# Altium PCB RPlan_LB-button.PcbDoc
Units mm, origin at the board's own origin, x right, y up, seen from the top; angles counter-clockwise.
Board outline 38.2 x 43.28 mm, 2 copper layers (Top Layer, Bottom Layer); 36 components, 101 nets, 271 pads, 28 vias.
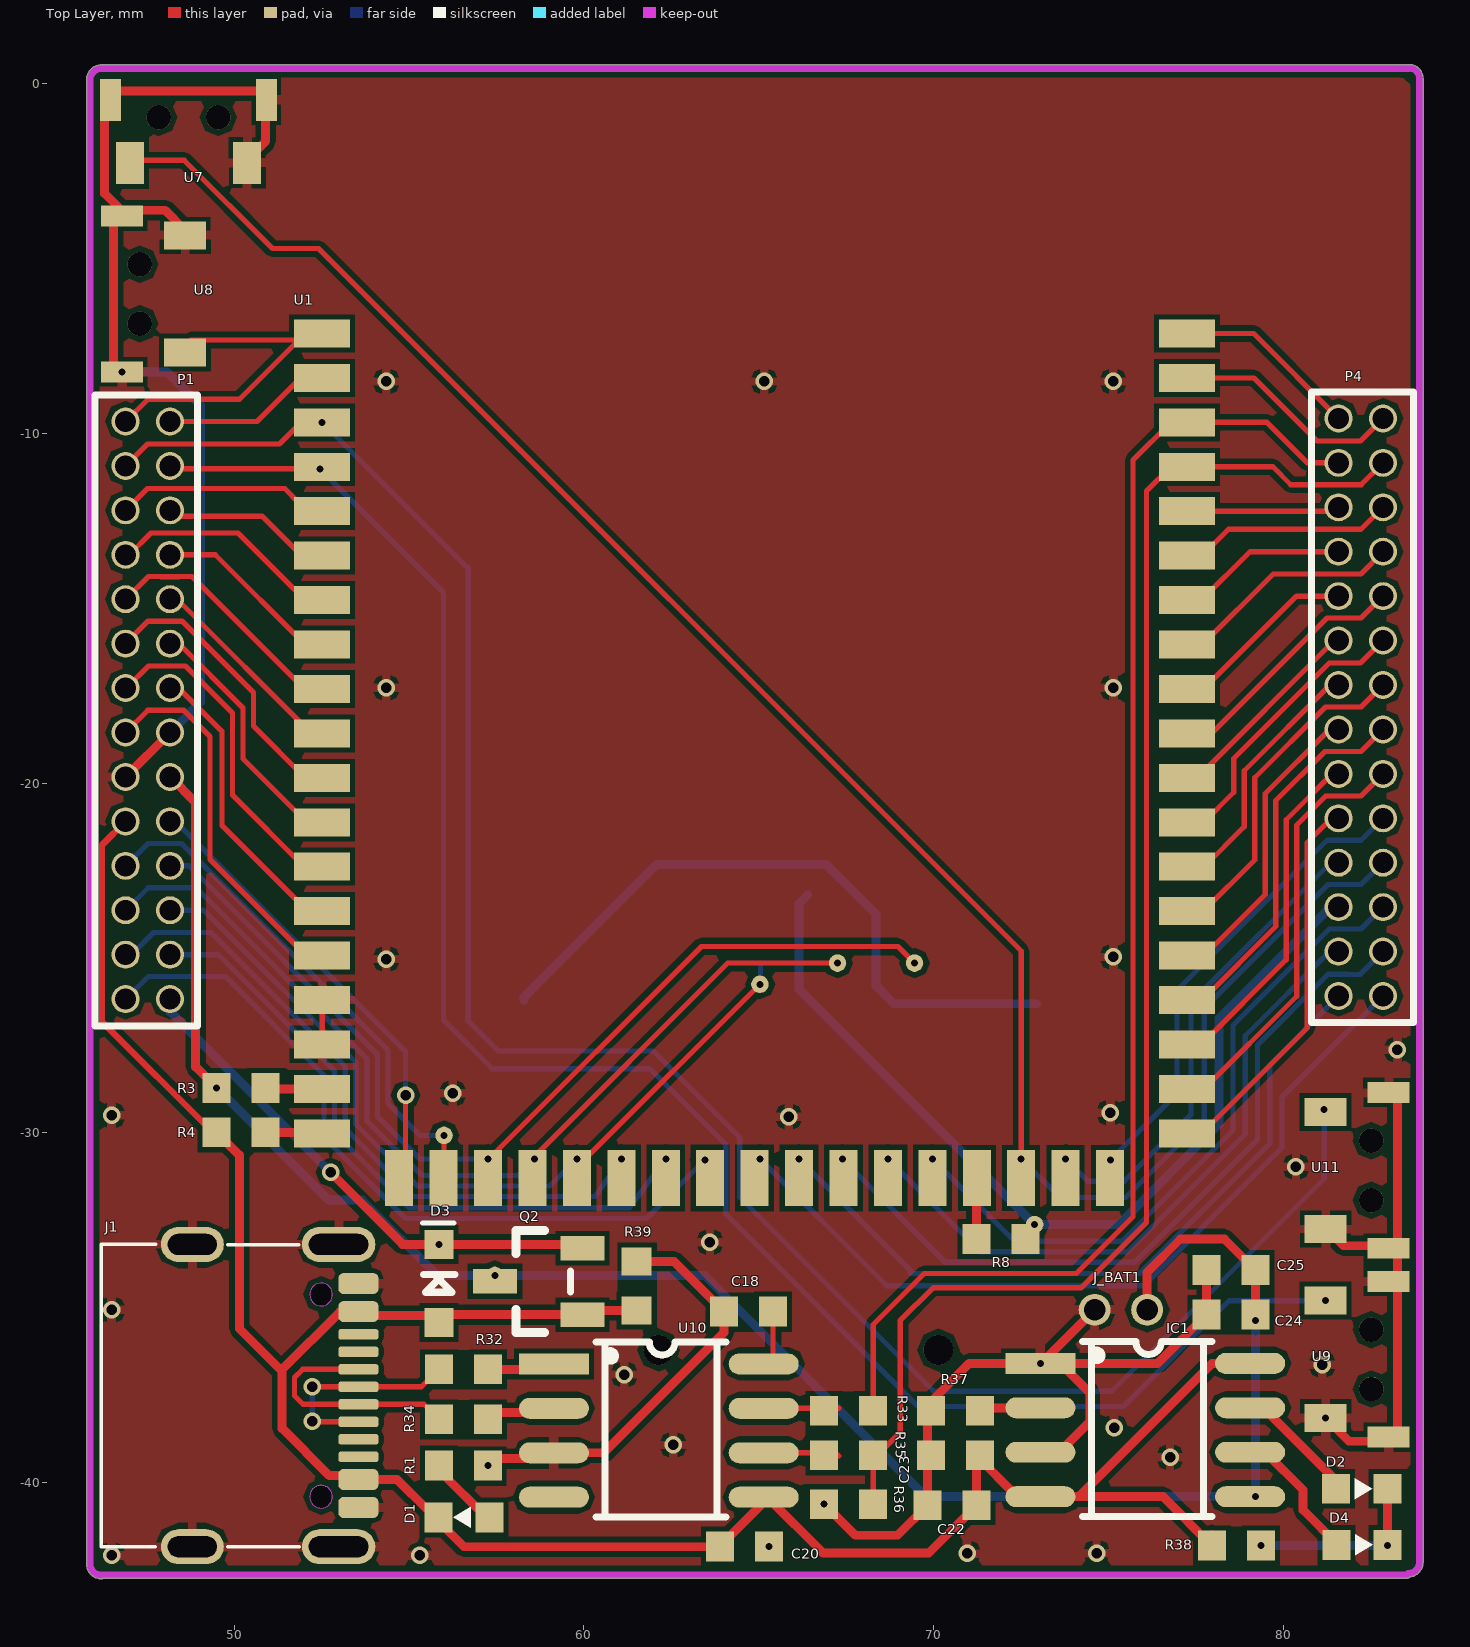
[diagram p0: Top Layer view]
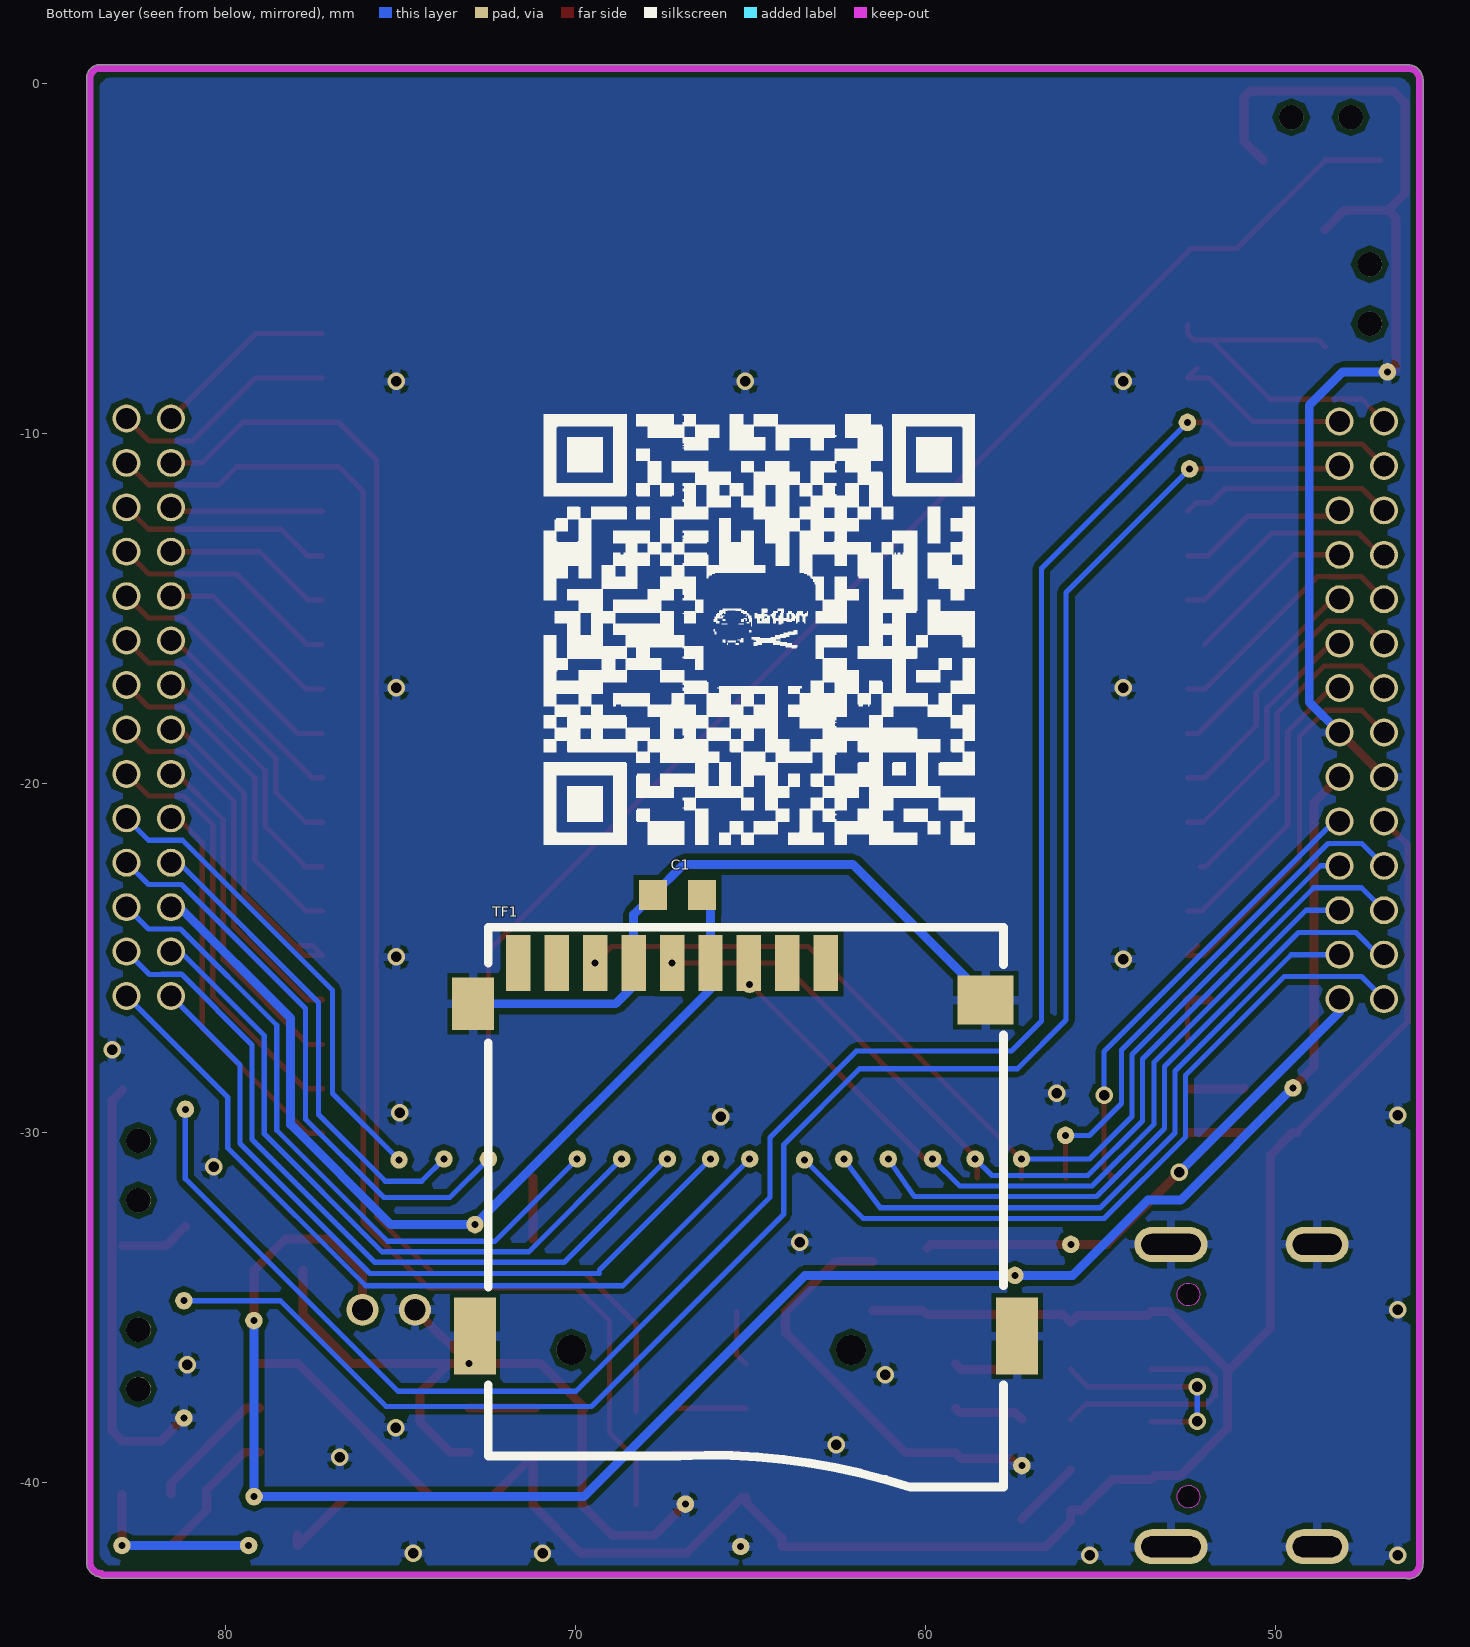
[diagram p1: Bottom Layer view, seen from below]

## Layer stack, top to bottom
Top Solder: solder mask 0.0102, Solder Resist, Dk 3.5
Top Layer: signal copper 0.0356
Dielectric 1: dielectric 0.32, FR-4, Dk 4.8
Bottom Layer: signal copper 0.0356
Bottom Solder: solder mask 0.0102, Solder Resist, Dk 3.5

## Board outline
45.782,-42.32 cw(c45.882,-42.32) 45.785,-42.295 cw(c45.882,-42.27) 45.782,-42.27 45.782,0.108 cw(c45.882,0.108) 45.783,0.123 cw(c46.206,0.108) 46.206,0.531 83.552,0.531 cw(c83.591,0.438) 83.591,0.539 cw(c83.591,0.148) 83.982,0.148 83.982,-42.269 83.982,-42.27 ccw(c83.882,-42.27) 83.982,-42.269 83.982,-42.27 cw(c83.559,-42.27) 83.602,-42.691 cw(c83.523,-42.629) 83.523,-42.729 46.255,-42.729 cw(c46.205,-42.642) 46.205,-42.743 cw(c46.205,-42.32)

## Design rules (kind name [scope] priority, off if disabled: settings)
Clearance [All] p1: gap=0.15 ignorepadtopadclearanceinfootprint=FALSE
PolygonConnect [All] p1: connectstyle=Relief reliefconductorwidth=0.254 reliefentries=4 polygonreliefangle="90 Angle" airgapwidth=0.127
RoutingVias [All] p1: holewidth=0.711 width=1.27 viastyle="Through Hole" minholewidth=0.711 minwidth=1.27 maxholewidth=0.711 maxwidth=1.27
SolderMaskExpansion [All] p1: expansion=0.102
Width [All] p1: maxlimit=0.254 minlimit=0.1 preferedwidth=0.254
30 further rules are at their usual default settings.

## Components (designator, comment, footprint, x,y, rotation, side; value= is the part's Value field where it differs from the comment)
C1 "0.1uf" 0603C 67.091,-23.198 r0 bottom
C18 "104" 0603C 64.705,-35.106 r180 top
C20 "104" 0603C 64.584,-41.82 r0 top
C22 "105" 0603C 70.52,-40.637 r0 top
C23 "104" 0603C 70.615,-39.212 r180 top
C24 "104" 0603C 78.494,-35.189 r180 top
C25 "106" 0603C 78.494,-33.919 r0 top
D1 "LED0" 0603_LED_R 56.6,-41.07 r0 top
D2 "LED0" 0603_LED_R 82.195,-40.091 r180 top
D3 "1N5819" SOD-323 55.85,-34.3 r90 top
D4 "LED0" 0603_LED_G 82.205,-41.77 r180 top
IC1 "TP4056/TC4056" SOP8_150mil 76.043,-38.491 r0 top
J1 "USB_TypeC" USB_TypeC 48.806,-41.826 r270 top
J_BAT1 "Header 2" BAT 75.346,-34.554 r180 top
P1 "connect" CONNECT2 49.075,-26.936 r180 top
P4 "connect" CONNECT2 80.662,-8.814 r0 top
Q2 "PMOS" SOT-23-3 58.709,-34.244 r0 top
R1 "10K" 0603C 56.55,-39.507 r180 top
R3 "" 0603C 50.2,-28.712 r180 top value=0R
R4 "" 0603C 50.2,-29.982 r180 top value=0R
R8 "" 0603C 71.917,-33.03 r0 top value=0R
R32 "0R" 0603C 56.55,-36.756 r180 top
R33 "1.2K" 0603C 67.567,-37.942 r180 top
R34 "0R" 0603C 56.55,-38.181 r180 top
R35 "1.2K" 0603C 67.567,-39.212 r180 top
R36 "1.5K" 0603C 67.567,-40.609 r0 top
R37 "1.5K" 0603C 70.615,-37.942 r180 top
R38 "4.7K" 0603C 78.648,-41.793 r180 top
R39 "100K" 0603C 61.503,-34.369 r270 top
TF1 "" TF1 62.848,-25.145 r180 bottom
U1 "RW052" RW052 64.877,-15.629 r0 top
U7 "key" KEY 48.697,-0.97 r0 top
U8 "key" KEY 47.3,-6.02 r90 top
U9 "key" KEY 82.5,-36.47 r270 top
U10 "CH330N" SOP8_150mil 62.138,-38.506 r0 top
U11 "key" KEY 82.5,-31.07 r270 top

## Footprints (in the part's own frame and the unit in brackets; to place one, negate y for a bottom-side part, rotate by r counter-clockwise, add the part's x,y. Pads: shape width x height; smd on the part's side, far side on the other; paste and mask are expansions set on the pad)
0603_LED_G [mm]
  rect 0.8x0.85 smd: 1(-0.765,0.007) 2(0.695,0.007)
  silkscreen extent -0.34,-0.29 0.17,0.31, body extent -0.84,-0.39 0.78,0.41, height 0.6
0603_LED_R [mm]
  rect 0.8x0.85 smd: 1(-0.765,0.08) 2(0.695,0.08)
  silkscreen extent -0.34,-0.22 0.17,0.38, body extent -0.84,-0.32 0.78,0.48, height 0.6
0603C [mm] "http://www.samsungsem.com/cn/front/downloadcms.do?path=%2F%2Fcn%2F%2Fsupport%2F%2Flibrary%2F%2Fproduct-catalog%2F%2F__icsFiles%2F%2Fafieldfile%2F%2F2015%2F%2F01%2F%2F12&fileName=CHIP_RESISTOR_150112_12.pdf"
  rect 0.8x0.85 smd: 1(-0.7,0) 2(0.7,0)
  Top Layer pour cut-out: -1.245,0.584 -1.245,-0.559 1.245,-0.559 1.245,0.584
  body extent -0.85,-0.45 0.85,0.45, height 0.55
BAT [mil]
  round 36 hole 24: 1(29.53,19.68) 2(-29.53,19.68)
CONNECT2 [mm]
  round 0.8 hole 0.6: 1(0.907,-0.762) 2(2.177,-0.762) 3(0.907,-2.032) 4(2.177,-2.032) 5(0.907,-3.302) 6(2.177,-3.302) 7(0.907,-4.572) 8(2.177,-4.572) 9(0.907,-5.842) 10(2.177,-5.842) 11(0.907,-7.112) 12(2.177,-7.112) 13(0.907,-8.382) 14(2.177,-8.382) 15(0.907,-9.652) 16(2.177,-9.652) 17(0.907,-10.922) 18(2.177,-10.922) 19(0.907,-12.192) 20(2.177,-12.192) 21(0.907,-13.462) 22(2.177,-13.462) 23(0.907,-14.732) 24(2.177,-14.732) 25(0.907,-16.002) 26(2.177,-16.002) 27(0.907,-17.272) 28(2.177,-17.272)
  silkscreen extent 0.13,-18.03 3.05,0, body extent 0.04,-18.11 3.14,0.07, height 3.4
KEY [mm]
  round 0.7 hole 0.7: 0(-0.85,0) 0(0.85,0)
  rect 0.8x1.2 smd: 1(1.675,-1.3) 2(-1.675,-1.3)
  rect 0.6x1.2 smd: 3(2.225,0.5) 4(-2.225,0.5)
  body extent -2.32,-2.2 2.33,2.1, height 2
RW052 [mm]
  rect 1.6x0.8 smd: 1(-12.36,8.48) 2(-12.36,7.21) 3(-12.36,5.94) 4(-12.36,4.67) 5(-12.36,3.4) 6(-12.36,2.13) 7(-12.36,0.86) 8(-12.36,-0.41) 9(-12.36,-1.68) 10(-12.36,-2.95) 11(-12.36,-4.22) 12(-12.36,-5.49) 13(-12.36,-6.76) 14(-12.36,-8.03) 15(-12.36,-9.3) 16(-12.36,-10.57) 17(-12.36,-11.84) 18(-12.36,-13.11) 19(-12.36,-14.38) 37(12.36,-14.38) 38(12.36,-13.11) 39(12.36,-11.84) 40(12.36,-10.57) 41(12.36,-9.3) 42(12.36,-8.03) 43(12.36,-6.76) 44(12.36,-5.49) 45(12.36,-4.22) 46(12.36,-2.95) 47(12.36,-1.68) 48(12.36,-0.41) 49(12.36,0.86) 50(12.36,2.13) 51(12.36,3.4) 52(12.36,4.67) 53(12.36,5.94) 54(12.36,7.21) 55(12.36,8.48)
  rect 0.8x1.6 smd: 20(-10.16,-15.66) 21(-8.89,-15.66) 22(-7.62,-15.66) 23(-6.35,-15.66) 24(-5.08,-15.66) 25(-3.81,-15.66) 26(-2.54,-15.66) 27(-1.27,-15.66) 28(0,-15.66) 29(1.27,-15.66) 30(2.54,-15.66) 31(3.81,-15.66) 32(5.08,-15.66) 33(6.35,-15.66) 34(7.62,-15.66) 35(8.89,-15.66) 36(10.16,-15.66)
SOD-323 [mm]
  rect 0.83x0.83 smd: 1(-1.115,0) 2(1.115,0)
  silkscreen extent -0.25,-0.46 1.73,0.46
SOP8_150mil [mm]
  rect 2x0.6 smd: 1(-2.997,1.905)
  rrect100% 2x0.6 smd: 2(-2.997,0.635) 3(-2.997,-0.635) 4(-2.997,-1.905) 5(2.997,-1.905) 6(2.997,-0.635) 7(2.997,0.635) 8(2.997,1.905)
  silkscreen extent -1.79,-2.47 1.91,2.53, body extent -3.05,-2.5 2.99,2.52, height 1.6
SOT-23-3 [mm]
  rect 1.25x0.7 smd: 1(1.25,-0.95) 2(1.25,0.95) 3(-1.25,0)
  silkscreen extent -0.65,-1.46 0.9,1.46, body extent -1.5,-1.5 1.5,1.5, height 1.3
TF1 [mm]
  rect 0.7x1.6 smd: 1(0,0) 2(-1.1,0) 3(-2.2,0) 4(-3.3,0) 5(-4.4,0) 6(-5.5,0) 7(-6.6,0) 8(-7.7,0) 9(-8.8,0)
  rect 1.2x1.5 smd: 10(-10.083,-1.16)
  rect 1.2x2.2 smd: 10(-10.033,-10.66) 10(5.467,-10.66)
  rect 1.6x1.4 smd: 10(4.567,-1.06)
  round 0.85 hole 0.85 unplated: NC(-7.283,-11.06) NC(0.717,-11.06)
  silkscreen extent -9.65,-14.98 5.08,1.02, body extent -10.42,-15.24 5.85,-0.05, height 2.3
USB_TypeC [mm]
  round 0.65 hole 0.65 unplated: 0(-7.21,3.68) 0(-1.43,3.68)
  rrect50% 0.6x1.15 smd: A1(-7.52,4.745) A4(-6.72,4.745) B1(-1.12,4.745) B4(-1.92,4.745)
  rrect50% 0.3x1.15 smd: A5(-5.57,4.745) A6(-4.57,4.745) A7(-4.07,4.745) A8(-3.07,4.745) B5(-2.57,4.745) B6(-3.57,4.745) B7(-5.07,4.745) B8(-6.07,4.745)
  oval 1x2.1 hole 0.6 slot 1.7 at 90 deg: GND(-8.64,4.18) GND(0,4.18)
  oval 1x1.8 hole 0.6 slot 1.4 at 90 deg: GND(-8.64,0) GND(0,0)
  Keep-Out Layer circle w0.025: c-7.21,3.68 r0.325
  Keep-Out Layer circle w0.025: c-1.43,3.68 r0.325
  silkscreen extent -8.64,-2.6 0,3.05, body extent -9.27,-3.78 0.63,6.22, height 3.3

## Part data
C1 C18 C20 C23 C24 C25: library part Cap, "Capacitor", LatestRevisionDate=17-Jul-2002, LatestRevisionNote="Re-released for DXP Platform.", PackageReference=RAD-0.3, Published=8-Jun-2000, Publisher="Altium Limited"
C22: library part CAP, "Capacitor"
D1 D2 D4: "Typical INFRARED GaAs LED", LatestRevisionDate=08-Jul-2005, LatestRevisionNote="Mech Layer 1 removed.", PackageDescription="LED; 2 Leads", PackageReference=LED-0, Published=8-Jun-2000, Publisher="Altium Limited"
D3: library part Diode_SOD123, "Diode", Type=SOD123
IC1: library part 4056
J1: "USB"
J_BAT1: "Header, 2-Pin", LatestRevisionDate=17-Jul-2002, LatestRevisionNote="Re-released for DXP Platform.", Publisher="Altium Limited"
Q2: library part MOSFET_P_SOT23, "MOSFET"
R1 R32 R33 R34 R35 R36 R37 R38 R39: library part RES, "RES"
R3 R4 R8: library part Res2, "Resistor", LatestRevisionDate=17-Jul-2002, LatestRevisionNote="Re-released for DXP Platform.", PackageDescription="Axial Device, Thru-Hole; 2 Leads; 0.4 in Pin Spacing", PackageReference=AXIAL-0.4, Published=8-Jun-2000, Publisher="Altium Limited"
TF1: library part "HEADER 10"

## Free pads (board coordinates)
  round 0.5 hole 0.2: 39(56,-30.07) 40(57.257,-30.744) 41(58.582,-30.744) 42(59.798,-30.744) 43(61.067,-30.744) 44(62.337,-30.744) 45(63.46,-30.767) 46(65.027,-30.744) 47(66.147,-30.744) 48(67.383,-30.744) 49(68.687,-30.744) 50(69.957,-30.744) 52(72.497,-30.744) 53(73.767,-30.744) 54(72.881,-32.62) 55(79.348,-41.793) 56(82.97,-41.793) 80(69.448,-25.145) 81(67.248,-25.145) 82(65.027,-25.75) 83(81.158,-29.323) 84(81.2,-34.795) 85(52.517,-9.689) 86(52.454,-11.018) 87(75.05,-30.767) 90(55.85,-33.185) 92(79.2,-35.364) 93(79.194,-40.396) 94(57.45,-34.07) 95(49.5,-28.712) 111(65.284,-41.82) 112(66.867,-40.609) 113(57.25,-39.507) 114(81.2,-38.145) 115(46.8,-8.245) 116(73.046,-36.586)

## Via types
v1: diameter 0.5, hole 0.3, Top Layer to Bottom Layer, 28 vias

## Nets (pads, with @x,y where several pads share a name; then routed paths per layer and width w, separated by ;. In a path a pad name is that pad's centre, name@x,y a point inside that pad or via, vN(x,y) a via of type N, cw(c..) or ccw(c..) an arc to the next point about the centre after c; other vN are vias at no path point)
AGND: P4.14 U1.42 | length 9.7
  Top Layer w0.15: U1.42 77.711,-23.659 79.174,-22.196 79.174,-19.846 81.199,-17.821 82.214,-17.821 P4.14
AUDLN: P4.10 U1.46 | length 7.2
  Top Layer w0.15: U1.46 77.941,-18.579 81.237,-15.283 82.212,-15.283 P4.10
AUDLP: P4.9 U1.47 | length 5.4
  Top Layer w0.15: U1.47 77.711,-17.309 80.364,-14.656 P4.9
AUDRN: P4.12 U1.44 | length 8.3
  Top Layer w0.15: U1.44 77.717,-21.119 78.574,-20.262 78.574,-19.296 81.3,-16.57 82.195,-16.57 P4.12
AUDRP: P4.13 U1.43 | length 7.4
  Top Layer w0.15: U1.43 77.729,-22.389 78.874,-21.244 78.874,-19.646 81.324,-17.196 P4.13
CAM_PWND: 
CAM_RST: 
CEN: P4.22 pad.52 U1.34 U7.2 | length 57.4
  Top Layer w0.15: U7.2@47.001,-2.199 48.575,-2.199 51.096,-4.72 52.415,-4.72 72.497,-24.802 pad.52
  Bottom Layer w0.15: pad.52 73.601,-31.848 75.484,-31.848 77.726,-29.606 77.726,-26.444 81.269,-22.901 82.214,-22.901 P4.22
GND: C1.2 C18.2 C20.2 C22.1 C23.2 C24.2 C25.1 IC1.1 IC1.3 J1.A1 J1.B1 J1.GND J_BAT1.1 P1.12 P1.13 pad.111 pad.112 pad.113 pad.114 pad.115 pad.116 R1.1 R36.1 R37.2 R39.1 TF1.6 TF1.10 U1.16 U1.17 U7.1 U7.3 U7.4 U8.1 U8.3 U8.4 U9.1 U9.3 U9.4 U10.3 U11.1 U11.3 U11.4 | length 101.5
  Top Layer w0.15: U1.17 U1.16
  Top Layer w0.254: pad.115 46.768,-8.237 46.55,-8.188 46.55,-3.856 U8.3@46.779,-3.627 ; P1.12 P1.13 ; U8.1@48.579,-4.177 48.029,-3.627 U8.3@46.779,-3.627 ; U7.1@50.351,-2.199 50.901,-1.649 50.901,-0.399 50.715,-0.213 46.637,-0.213 46.3,-0.55 46.3,-3.148 U8.3@46.779,-3.627 ; U1.16@51.878,-26.199 U1.16 ; pad.113@57.25,-39.634 57.575,-39.309 58.973,-39.309 U10.3 60.565,-39.141 64.005,-35.701 C18.2 62.568,-33.669 R39.1 ; pad.112 67.756,-41.498 68.961,-41.498 69.82,-40.639 C22.1 69.82,-39.212 69.82,-37.921 69.755,-37.856 69.755,-37.846 71.015,-36.586 pad.116 pad.116@73.064,-36.586 ; IC1.3 73.585,-39.126 74.457,-38.254 74.457,-37.429 IC1.1@73.614,-36.586 ; J_BAT1.1 pad.116@73.064,-36.586 ; C25.1 C24.2 76.397,-36.586 IC1.1@73.614,-36.586 ; U11.1@81.158,-32.673 81.708,-33.223 U11.3@82.958,-33.223 ; pad.114 81.866,-38.811 82.958,-38.811 83.25,-38.519 83.25,-29.065 U11.4@82.958,-28.773 ; pad.116@73.064,-36.586 IC1.1@73.614,-36.586
  Bottom Layer w0.254: pad.115 48.075,-8.245 49.033,-9.203 49.033,-17.689 P1.13 ; TF1.10@58.281,-26.205 58.281,-26.123 62.083,-22.321 66.914,-22.321 C1.2 68.348,-23.755 TF1.6 68.348,-25.792 68.861,-26.305 TF1.10@72.931,-26.305
  other v1: 46.5,-42.07 55.305,-42.07 70.95,-42.02 74.65,-42.006 76.75,-39.27 62.55,-38.917 75.15,-38.42 61.15,-36.904 81.1,-36.62 46.5,-35.054 63.6,-33.12 80.35,-30.97 65.85,-29.532 46.5,-29.498 75.037,-29.42 56.25,-28.87 83.25,-27.62 54.35,-25.029 75.128,-24.97 54.35,-17.27 75.128,-17.27 54.35,-8.52 65.15,-8.52 75.128,-8.52
IN_N: 
IN_P: 
LINEL: P4.5 U1.51 | length 4.4
  Top Layer w0.15: U1.51 81.456,-12.229 P4.5
MCLK: 
MIC_N: 
MIC_P: 
MICBIAS: P4.6 U1.50 | length 6.2
  Top Layer w0.15: U1.50 77.671,-13.499 78.427,-12.743 82.212,-12.743 P4.6
MICLN: P4.8 U1.48 | length 6.7
  Top Layer w0.15: U1.48 77.681,-16.039 79.7,-14.02 82.205,-14.02 P4.8
MICLP: P4.7 U1.49 | length 4.9
  Top Layer w0.15: U1.49 77.651,-14.769 79.034,-13.386 P4.7
MUTE: 
NetC2_1: 
NetC7_1: 
NetC8_1: 
NetC9_1: 
NetC14_2: 
NetC15_2: 
NetC18_1: C18.1 U10.8 | length 1.6
  Top Layer w0.15: U10.8 65.405,-36.331 C18.1
NetD1_2: D1.2 R1.2 | length 2
  Top Layer w0.254: R1.2@55.85,-39.634 55.853,-39.634 D1.2@57.25,-41.031
NetD2_1: D2.1 D4.1 pad.55 pad.56 R38.1 | length 5.1
  Top Layer w0.254: pad.56 D2.1@82.97,-40.325
  Bottom Layer w0.254: pad.55 pad.56
NetD2_2: D2.2 IC1.7 | length 3.7
  Top Layer w0.254: IC1.7 79.415,-37.856 81.57,-40.01 D2.2@81.57,-40.325
NetD4_2: D4.2 IC1.6 | length 4
  Top Layer w0.254: IC1.6 79.474,-39.126 80.553,-40.205 80.553,-40.776 D4.2@81.57,-41.793
NetIC1_2: IC1.2 R37.1 | length 1.9
  Top Layer w0.254: R37.1@71.155,-37.856 IC1.2
NetQ1_1: 
NetQ1_3: 
NetR3_1: R3.1 U1.18 | length 1.6
  Top Layer w0.254: R3.1 50.927,-28.739 U1.18
NetR4_1: R4.1 U1.19 | length 1.6
  Top Layer w0.254: R4.1 52.49,-29.982 U1.19
NetR15_1: 
NetR16_1: 
NetR17_2: 
NetR18_2: 
NetR24_2: 
NetR26_2: 
NetR28_2: 
NetR32_1: R32.1 U10.1 | length 2
  Top Layer w0.254: R32.1 58.986,-36.756 U10.1
NetR33_2: R33.2 U10.7 | length 2.1
  Top Layer w0.15: U10.7 67.28,-37.871
NetR34_1: R34.1 U10.2 | length 2
  Top Layer w0.254: R34.1 57.439,-37.992 59.02,-37.992 U10.2
NetR35_2: R35.2 U10.6 | length 2.2
  Top Layer w0.15: U10.6 67.187,-39.141 67.28,-39.234
P0: P4.1 U1.55 | length 5.3
  Top Layer w0.15: U1.55 79.142,-7.149 P4.1
P1: P4.2 U1.54 | length 6.6
  Top Layer w0.15: U1.54 79.149,-8.419 80.95,-10.22 82.195,-10.22 P4.2
P2: P4.17 U1.39 | length 9.9
  Top Layer w0.15: U1.39 77.651,-27.469 80.073,-25.046 80.073,-21.046 81.384,-19.736 P4.17
P3: P4.19 U1.37 | length 11.2
  Top Layer w0.15: U1.37 77.661,-30.009 80.673,-26.996 80.673,-21.696 81.364,-21.006 P4.19
P4: P4.18 U1.38 | length 12.2
  Top Layer w0.15: U1.38 77.726,-28.739 80.373,-26.091 80.373,-21.196 81.2,-20.37 82.205,-20.37 P4.18
P5: P4.20 pad.87 U1.36 | length 13.6
  Bottom Layer w0.15: pad.87 76.95,-28.867 76.95,-25.92 81.237,-21.633 82.212,-21.633 P4.20
P6: P4.16 U1.40 | length 11.3
  Top Layer w0.15: U1.40@77.632,-26.172 77.264,-26.172 U1.40 77.674,-26.199 79.774,-24.099 79.774,-20.496 81.177,-19.093 82.212,-19.093 P4.16
P7: P4.15 U1.41 | length 9.5
  Top Layer w0.15: U1.41@77.886,-24.648 77.518,-24.648 U1.41 77.73,-24.929 79.474,-23.185 79.474,-20.296 81.304,-18.466 P4.15
P10: P4.4 R35.1 R36.2 U1.52 | length 42.3
  Top Layer w0.15: R36.2 R35.1 68.386,-39.212 69.037,-38.561 69.037,-35.364 69.974,-34.427 74.204,-34.427 76.076,-32.555 76.076,-11.653 76.77,-10.959 U1.52 79.689,-10.959 80.201,-11.471 82.214,-11.471 P4.4
P11: P4.3 R33.1 U1.53 | length 39.6
  Top Layer w0.15: R33.1 68.267,-35.478 69.726,-34.019 74.071,-34.019 75.695,-32.395 75.695,-10.764 76.77,-9.689 U1.53 79.519,-9.689 80.676,-10.846 P4.3
P12: P1.26 pad.83 pad.85 U1.3 U11.2 | length 59.3
  Top Layer w0.15: P1.26 47.527,-10.305 51.292,-10.305 51.908,-9.689 pad.85
  Bottom Layer w0.15: pad.85 56.69,-13.862 56.69,-26.796 57.549,-27.655 61.979,-27.655 64.45,-30.126 64.45,-31.837 69.996,-37.383 75.084,-37.383 81.158,-31.309 pad.83
P13: P1.25 pad.84 pad.86 U1.4 U9.2 | length 53.7
  Top Layer w0.15: P1.25 48.252,-11.018 pad.86
  Bottom Layer w0.15: pad.86 55.987,-14.551 55.987,-26.773 57.377,-28.163 61.889,-28.163 64.052,-30.326 64.052,-32.319 69.548,-37.815 75.418,-37.815 78.438,-34.795 pad.84
P14: P1.6 pad.41 pad.81 TF1.5 U1.23 | length 28.2
  Top Layer w0.15: U1.23 58.527,-30.726 64.108,-25.145 pad.81
  Bottom Layer w0.15: P1.6 47.543,-22.989 48.907,-22.989 53.8,-27.882 53.8,-29.653 55.366,-31.219 58.107,-31.219 pad.41
P15: P1.4 pad.43 U1.25 | length 19.2
  Bottom Layer w0.15: P1.4 47.066,-24.904 47.7,-24.27 49.34,-24.27 53.174,-28.104 53.174,-29.875 55.117,-31.819 60.313,-31.819 60.319,-31.812 pad.43
P16: P1.5 pad.42 pad.82 TF1.3 U1.24 | length 23.9
  Top Layer w0.15: pad.42 60.033,-30.744 pad.82
  Bottom Layer w0.15: P1.5 49.128,-23.634 53.474,-27.98 53.474,-29.751 55.242,-31.519 59.023,-31.519 pad.42 ; TF1.3@65.048,-25.494 TF1.3
P17: P1.7 pad.40 pad.80 TF1.7 U1.22 | length 29
  Top Layer w0.15: U1.22 57.257,-30.767 63.354,-24.67 68.973,-24.67 pad.80
  Bottom Layer w0.15: P1.7 48.706,-22.364 54.1,-27.757 54.1,-29.529 55.315,-30.744 pad.40
P18: P1.3 pad.44 U1.26 | length 18.9
  Bottom Layer w0.15: P1.3 49.549,-24.904 52.872,-28.226 52.872,-29.941 52.874,-29.944 52.874,-30 55.015,-32.141 61.293,-32.141 pad.44
P19: P1.8 pad.39 U1.21 | length 14.9
  Top Layer w0.15: U1.21 56,-31.276 pad.39
  Bottom Layer w0.15: P1.8 47.533,-21.729 48.496,-21.729 54.4,-27.633 54.4,-29.157 55.313,-30.07 pad.39
P20: P4.24 pad.50 U1.32 | length 19.6
  Bottom Layer w0.15: pad.50 72.308,-33.095 75.375,-33.095 78.548,-29.922 78.548,-26.922 81.3,-24.17 81.309,-24.17 81.31,-24.171 82.214,-24.171 P4.24
P21: P4.25 pad.49 U1.31 | length 19.2
  Bottom Layer w0.15: pad.49 71.338,-33.395 75.535,-33.395 78.9,-30.03 78.9,-27.22 81.304,-24.816 P4.25
P22: P4.26 pad.48 U1.30 | length 21.9
  Bottom Layer w0.15: pad.48 70.337,-33.698 75.734,-33.698 79.25,-30.182 79.25,-27.484 81.273,-25.461 81.828,-25.461 81.837,-25.47 82.185,-25.47 P4.26
P23: P4.27 pad.47 U1.29 | length 21.3
  Bottom Layer w0.15: pad.47 69.322,-33.919 ; 69.322,-34.019 75.881,-34.019 79.6,-30.3 79.6,-28.055 P4.27
P24: P1.2 pad.45 U1.27 | length 21.4
  Bottom Layer w0.15: P1.2 47.543,-25.529 49.75,-25.529 52.572,-28.35 52.572,-30.121 54.896,-32.446 61.782,-32.446 pad.45
P25: P1.27 U1.2 | length 5.3
  Top Layer w0.15: P1.27 50.65,-9.664 51.895,-8.419 U1.2 U1.2@52.236,-8.138
P26: P4.28 pad.46 U1.28 | length 23.6
  Bottom Layer w0.15: pad.46 68.652,-34.369 76.004,-34.369 79.95,-30.423 79.95,-28.975 P4.28
P27: P1.21 U1.8 | length 4.9
  Top Layer w0.15: P1.21 49.461,-13.474 U1.8@52.026,-16.039
P28: P1.28 U1.1 U8.2 | length 10.3
  Top Layer w0.15: P1.28 47.533,-9.029 50.152,-9.029 U1.1@51.846,-7.335 ; U8.2@48.579,-7.527 48.771,-7.335 U1.1@51.846,-7.335 ; U1.1@52.517,-6.899 U1.1 52.331,-7.335 U1.1@51.846,-7.335
P29: P1.22 U1.7 | length 6.7
  Top Layer w0.15: P1.22 47.003,-13.474 47.628,-12.849 50.106,-12.849 52.026,-14.769 U1.7
P30: P1.20 U1.9 | length 7.2
  Top Layer w0.15: P1.20 47.55,-14.092 47.902,-14.092 47.909,-14.099 48.427,-14.099 48.434,-14.092 48.799,-14.092 52.016,-17.309 U1.9
P31: P1.19 U1.10 | length 5.9
  Top Layer w0.15: P1.19 48.374,-14.744 52.209,-18.579 U1.10
P32: P1.23 U1.6 | length 4.9
  Top Layer w0.15: P1.23 48.334,-12.37 50.796,-12.37 51.925,-13.499 U1.6
P33: P1.24 U1.5 | length 6.1
  Top Layer w0.15: P1.24 47.523,-11.579 51.446,-11.579 51.856,-11.989 52.277,-11.989 U1.5
P34: P1.18 U1.11 | length 8.3
  Top Layer w0.15: P1.18 47.542,-15.37 48.509,-15.37 50.55,-17.411 50.55,-18.366 52.033,-19.849 U1.11
P35: P1.17 U1.12 | length 7.3
  Top Layer w0.15: P1.17 48.416,-16.014 50.25,-17.848 50.25,-19.303 52.066,-21.119 U1.12
P36: P1.16 U1.13 | length 9.2
  Top Layer w0.15: P1.16 46.917,-17.284 47.55,-16.651 48.607,-16.651 49.95,-17.994 49.95,-20.34 51.999,-22.389 U1.13@52.132,-22.389
P37: P1.15 U1.14 | length 8.6
  Top Layer w0.15: P1.15 48.414,-17.284 49.65,-18.52 49.65,-21.213 52.096,-23.659 U1.14
P38: P1.14 U1.15 | length 11.2
  Top Layer w0.15: P1.14 47.532,-17.92 48.564,-17.92 49.311,-18.667 49.311,-22.181 52.059,-24.929 U1.15 U1.15@52.236,-24.648
P39: P1.9 U1.20 | length 13.2
  Top Layer w0.15: U1.20 54.664,-31.235 54.9,-30.999 v1(54.9,-28.92)
  Bottom Layer w0.15: P1.9 48.324,-21.094 54.9,-27.67 v1(54.9,-28.92)
PCLK: 
SCL: 
SDA: 
SPK_VDD: 
USBN: J1.A7 J1.B7 R34.2 | length 6.8
  Top Layer w0.15: J1.B7 51.962,-36.756 51.724,-36.994 51.724,-37.51 51.97,-37.756 J1.A7 55.425,-37.756 R34.2
USBP: J1.A6 J1.B6 R32.2 | length 6.1
  Top Layer w0.15: v1(52.232,-38.233) 52.255,-38.256 J1.B6 ; v1(52.232,-37.256) J1.A6 55.35,-37.256 R32.2
  Bottom Layer w0.15: v1(52.232,-38.233) v1(52.232,-37.256)
V1.8: 
V2.8: 
VBAT: C24.1 C25.2 IC1.5 J_BAT1.2 P1.11 pad.92 pad.93 pad.94 pad.95 Q2.3 R3.2 | length 55.2
  Top Layer w0.254: P1.11 48.9,-20.556 48.9,-28.112 pad.95 ; J_BAT1.2 76.096,-33.984 77.05,-33.03 78.305,-33.03 C25.2 C24.1
  Bottom Layer w0.254: pad.95 52.708,-31.92 53.65,-31.92 55.8,-34.07 pad.94 63.444,-34.07 69.77,-40.396 pad.93 79.194,-35.37 pad.92
VCOM: P4.11 U1.45 | length 6
  Top Layer w0.15: U1.45 77.521,-19.849 81.444,-15.926 P4.11
VDD: C1.1 P4.23 pad.54 R8.2 TF1.4 | length 26.5
  Bottom Layer w0.254: C1.1 66.148,-23.441 TF1.4 66.148,-25.887 pad.54 75.284,-32.62 78.15,-29.754 78.15,-26.722 81.326,-23.546 P4.23
VDDRAM: R8.1 U1.33 | length 1.7
  Top Layer w0.254: R8.1 71.217,-31.299 U1.33
VIO: P4.21 pad.53 U1.35 | length 13.9
  Bottom Layer w0.15: pad.53@73.962,-30.744 pad.53 74.4,-31.377 75.443,-31.377 77.35,-29.47 77.35,-26.27 81.344,-22.276 P4.21
VO_N: 
VO_P: 
VPWR: D3.2 P1.1 pad.90 Q2.2 | length 15
  Top Layer w0.254: v1(52.755,-31.125) 54.815,-33.185 pad.90 59.85,-33.185 Q2.2
  Bottom Layer w0.254: P1.1 48.168,-26.538 v1(52.755,-31.125)
VUSB: C20.1 C22.2 C23.1 D1.1 D3.1 IC1.4 IC1.8 J1.A4 J1.B4 P1.10 Q2.1 R4.2 R38.2 R39.2 U10.5 | length 70.3
  Top Layer w0.18: P1.10 46.222,-21.77 46.222,-26.82 R4.2@49.384,-29.982
  Top Layer w0.254: R4.2@49.384,-29.982 R4.2 50.15,-30.632 50.15,-35.588 51.312,-36.75 ; 51.349,-36.787 53.03,-35.106 J1.A4 53.664,-35.219 55.654,-35.219 D3.1 56.071,-35.194 Q2.1 60.084,-35.069 R39.2 ; 51.372,-36.848 51.372,-38.442 52.724,-39.794 53.439,-39.794 J1.B4 54.664,-39.906 55.535,-40.777 55.85,-40.777 55.85,-41.031 55.85,-41.105 56.57,-41.826 64.105,-41.826 64.105,-41.58 65.135,-40.55 U10.5 65.241,-40.411 66.836,-42.006 69.851,-42.006 C22.2 71.22,-39.234 72.382,-40.396 IC1.4 74.143,-40.396 ; R38.2@77.948,-41.488 R38.2 76.551,-40.396 74.143,-40.396 ; IC1.8 77.953,-36.586 74.143,-40.396
pads on no net: J1.0 J1.A5 J1.A8 J1.B5 J1.B8 TF1.1 TF1.2 TF1.8 TF1.9 TF1.NC U7.0 U8.0 U9.0 U10.4 U11.0

## Polygon pours and split planes (outlines as drawn)
GND on Bottom Layer (solid, pour order 38): 45.85,0.43 45.85,-42.5 45.95,-42.6 83.882,-42.6 83.882,0.418
GND on Top Layer (solid, pour order 34): 45.85,0.43 45.85,-42.5 45.95,-42.6 83.882,-42.6 83.882,0.418 83.85,0.45
GND on Top Layer "Top Layer-GND" (solid, pour order 8): 43.5,3.5

## Keep-outs
Keep-Out Layer:
  lines w0.2: 45.882,-42.32 ccw(c46.205,-42.32) 46.205,-42.642 ; 45.882,-42.27 45.882,0.108 cw(c46.206,0.108) 46.206,0.43 83.591,0.43 ; 46.205,-42.629 83.523,-42.629 83.559,-42.592 ccw(c83.559,-42.27) 83.882,-42.27 83.882,0.148 ccw(c83.591,0.148) 83.591,0.438

## Silkscreen, mask and mechanical layers (free items; w line width, h text height)
Bottom Overlay:
  drawing of 4510 lines, arcs and shapes, not listed

## Text inside footprints (layer, text, board x,y; h text height)
J_BAT1: Mechanical 1 "-" at 74.838,-33.919 h0.5 r180; Mechanical 1 "+" at 76.362,-33.919 h0.5 r180